# Altium PCB ver2.PcbDoc
Units mm, origin at the board's own origin, x right, y up, seen from the top; angles counter-clockwise.
Board outline 257.18 x 120.4 mm, 2 copper layers (Top Layer, Bottom Layer); 122 components, 93 nets, 415 pads, 0 vias.
Unrouted connection lines stored in the file: 14.
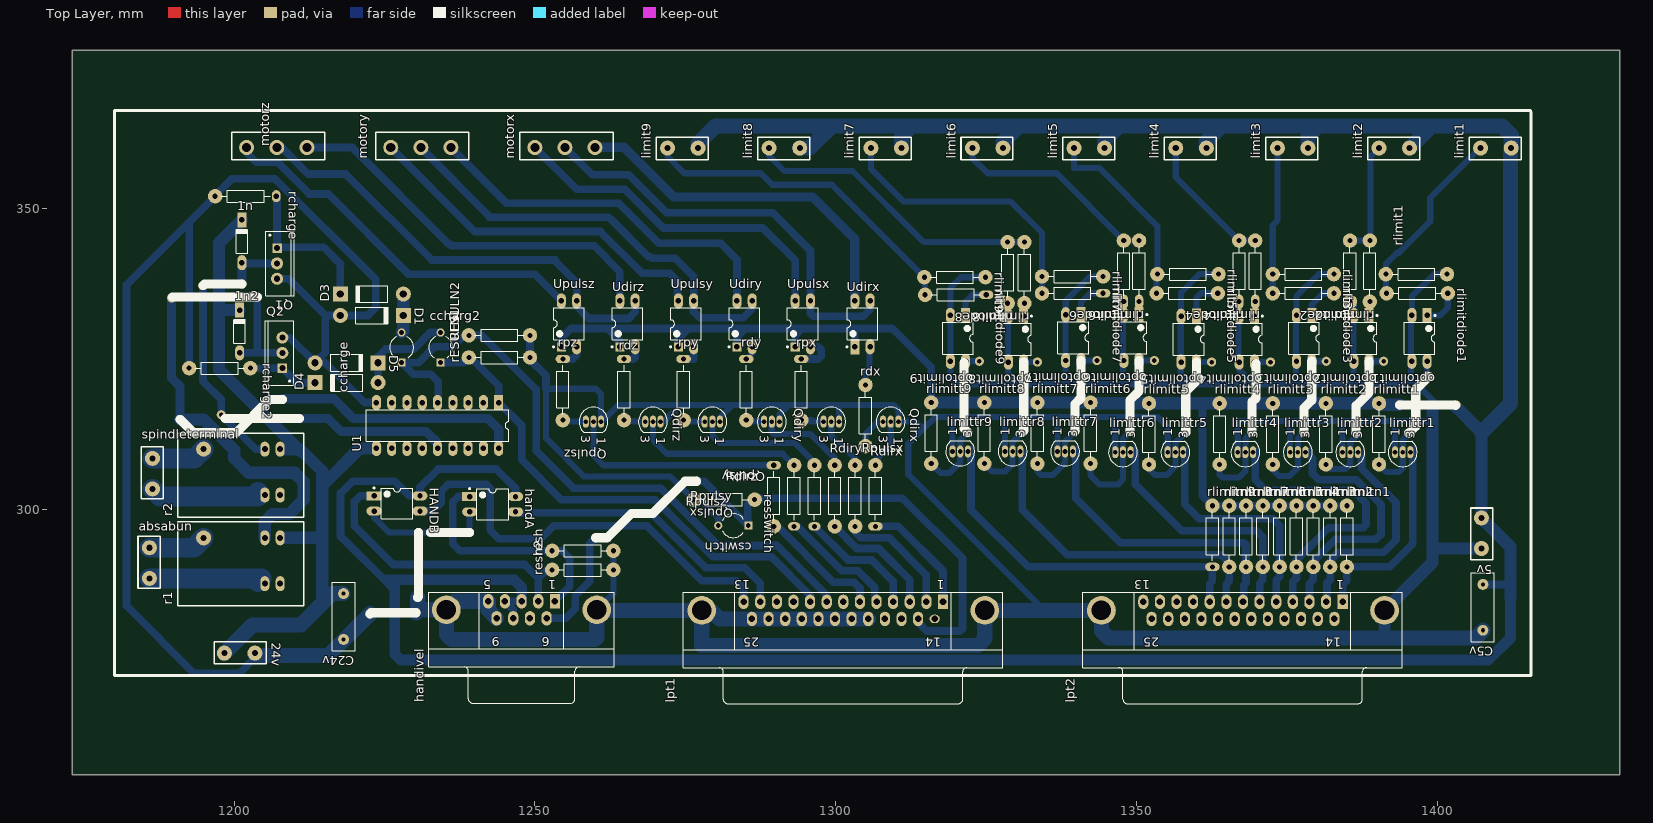
[diagram p0: Top Layer view]
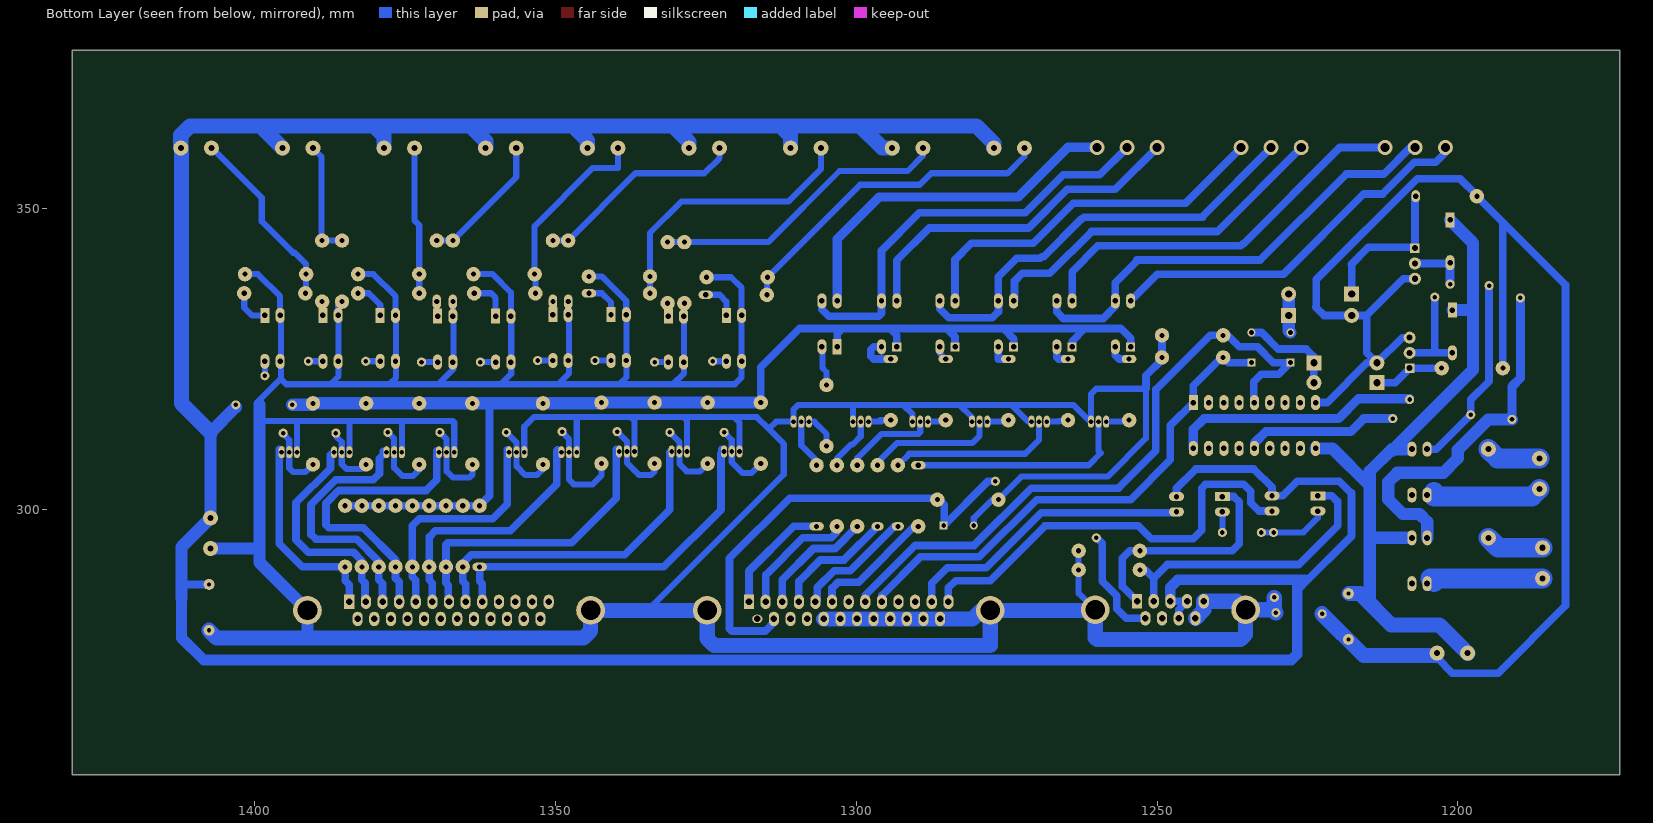
[diagram p1: Bottom Layer view, seen from below]

## Layer stack, top to bottom
Top Solder: solder mask 0.0102, Solder Resist, Dk 3.5
Top Layer: signal copper 0.0356
Dielectric 1: dielectric 0.32, FR-4, Dk 4.8
Bottom Layer: signal copper 0.0356
Bottom Solder: solder mask 0.0102, Solder Resist, Dk 3.5

## Board outline
1173.099,255.905 1430.274,255.905 1430.274,376.301 1173.099,376.301

## Design rules (kind name [scope] priority, off if disabled: settings)
Clearance [All] p1: gap=0.254
PolygonConnect [All] p1: connectstyle=Relief reliefconductorwidth=0.254 reliefentries=4 polygonreliefangle="90 Angle" airgapwidth=0.254
RoutingVias [All] p1: holewidth=0.711 width=1.27 viastyle="Through Hole" minholewidth=0.711 minwidth=1.27 maxholewidth=0.711 maxwidth=1.27
SolderMaskExpansion [All] p1: expansion=0.102
Width [All] p1: maxlimit=5.08 minlimit=0.254 preferedwidth=1.524
29 further rules are at their usual default settings.

## Components (designator, comment, footprint, x,y, rotation, side; value= is the part's Value field where it differs from the comment)
1n "Diode 1N914" DO-35 1201.293,344.551 r90 top
1n2 "Diode 1N914" DO-35 1200.912,329.565 r90 top
5v "termb2" PCBComponent_1#1 1407.287,298.577 r270 top
24v "termb2" PCBComponent_1#1 1198.372,276.098 r0 top
absabun "termb2" PCBComponent_1#1 1185.926,288.544 r90 top
C5v "Cap" RAD-0.3 1407.541,283.718 r270 top
C24v "Cap" RAD-0.3 1218.184,282.194 r270 top
ccharg2 "Cap2" CAPR5-4X5 1234.313,326.898 r90 top
ccharge "Cap2" CAPR5-4X5 1227.836,326.898 r90 top
cswitch "Cap2" CAPR5-4X5 1282.954,297.307 r180 top
D1 "Diode 1N4006" DO-41 1222.883,332.232 r0 top
D3 "Diode 1N4006" DO-41 1222.883,335.788 r180 top
D4 "Diode 1N4006" DO-41 1218.692,321.056 r180 top
D5 "Diode 1N4006" DO-41 1218.692,324.358 r0 top
handA "Optoisolator1" DIP-4#1 1242.949,300.863 r0 top
HANDB "Optoisolator1" DIP-4#1 1227.074,300.99 r0 top
handivel "D Connector 9" DSUB1.385-2H9 1247.775,273.812 r180 top
limit1 "termb2" PCBComponent_1#1 1412.24,360.045 r180 top
limit2 "termb2" PCBComponent_1#1 1395.349,360.045 r180 top
limit3 "termb2" PCBComponent_1#1 1378.458,360.045 r180 top
limit4 "termb2" PCBComponent_1#1 1361.567,360.045 r180 top
limit5 "termb2" PCBComponent_1#1 1344.676,360.045 r180 top
limit6 "termb2" PCBComponent_1#1 1327.785,360.045 r180 top
limit7 "termb2" PCBComponent_1#1 1310.894,360.045 r180 top
limit8 "termb2" PCBComponent_1#1 1294.003,360.045 r180 top
limit9 "termb2" PCBComponent_1#1 1277.112,360.045 r180 top
limittr1 "BC547" SOT54 1394.206,309.499 r90 top
limittr2 "BC547" SOT54 1385.491,309.499 r90 top
limittr3 "BC547" SOT54 1376.775,309.499 r90 top
limittr4 "BC547" SOT54 1368.06,309.499 r90 top
limittr5 "BC547" SOT54 1356.423,309.499 r90 top
limittr6 "BC547" SOT54 1347.708,309.499 r90 top
limittr7 "BC547" SOT54 1338.104,309.626 r90 top
limittr8 "BC547" SOT54 1329.388,309.626 r90 top
limittr9 "BC547" SOT54 1320.673,309.626 r90 top
lpt1 "D Connector 25" DSUB1.385-2H25A#1 1301.242,273.712 r180 top
lpt2 "D Connector 25" DSUB1.385-2H25A#2 1367.663,273.712 r180 top
motorx "terminal barg3" PCBComponent_1#2 1259.967,360.14 r180 top
motory "terminal barg3" PCBComponent_1#2 1236.027,360.14 r180 top
motorz "terminal barg3" PCBComponent_1#2 1212.088,360.14 r180 top
optolimit1 "Optoisolator1" DIP-4#1 1397,328.422 r270 top
optolimit2 "Optoisolator1" DIP-4#1 1387.348,328.422 r270 top
optolimit3 "Optoisolator1" DIP-4#1 1377.823,328.422 r270 top
optolimit4 "Optoisolator1" DIP-4#1 1368.298,328.295 r270 top
optolimit5 "Optoisolator1" DIP-4#1 1358.646,328.295 r270 top
optolimit6 "Optoisolator1" DIP-4#1 1349.121,328.549 r270 top
optolimit7 "Optoisolator1" DIP-4#1 1339.469,328.549 r270 top
optolimit8 "Optoisolator1" DIP-4#1 1329.944,328.295 r270 top
optolimit9 "Optoisolator1" DIP-4#1 1320.292,328.422 r270 top
Q1 "IRF530" TO-220AB 1207.135,340.868 r270 top
Q2 "IRF530" TO-220AB 1208.024,326.009 r90 top
Qdirx "BC547" SOT54 1309.116,314.579 r270 top
Qdiry "BC547" SOT54 1289.355,314.579 r270 top
Qdirz "BC547" SOT54 1269.594,314.579 r270 top
Qpulsx "BC547" SOT54 1299.235,314.579 r270 top
Qpulsy "BC547" SOT54 1279.474,314.579 r270 top
Qpulsz "BC547" SOT54 1259.713,314.579 r270 top
r1 "relay 24vdc" PCBComponent_1#3 1207.643,295.275 r180 top
r2 "relay 24vdc" PCBComponent_1#3 1207.643,310.007 r180 top
rcharge "Res2" AXIAL-0.4#1 1201.928,352.044 r0 top
rcharge2 "Res2" AXIAL-0.4#2 1197.61,323.469 r0 top
Rdirx "Res1" AXIAL-0.4#3 1306.576,302.26 r90 top
Rdiry "Res2" AXIAL-0.4#2 1299.82,302.26 r90 top
Rdirz "Res2" AXIAL-0.4#4 1293.063,302.26 r90 top
rdx "Res2" AXIAL-0.4#2 1304.925,315.595 r90 top
rdy "Res2" AXIAL-0.4#5 1285.113,319.913 r90 top
rdz "Res2" AXIAL-0.4#5 1264.793,319.913 r90 top
resh "Res2" AXIAL-0.4#2 1257.935,293.116 r180 top
resh2 "Res2" AXIAL-0.4#2 1257.935,289.941 r180 top
resswitch "Res2" AXIAL-0.4#2 1281.43,301.625 r0 top
rESULN1 "Res2" AXIAL-0.4#2 1244.092,325.247 r180 top
RESULN2 "Res2" AXIAL-0.4#2 1244.092,328.93 r180 top
rlimit1 "Res2" AXIAL-0.4#2 1396.492,339.09 r180 top
rlimit2 "Res2" AXIAL-0.4#2 1385.443,339.598 r270 top
rlimit3 "Res2" AXIAL-0.4#2 1377.696,339.09 r0 top
rlimit4 "Res2" AXIAL-0.4#6 1367.028,339.598 r270 top
rlimit5 "Res2" AXIAL-0.4#2 1358.519,339.09 r0 top
rlimit6 "Res2" AXIAL-0.4#6 1347.851,339.598 r270 top
rlimit7 "Res2" AXIAL-0.4#2 1339.342,338.709 r0 top
rlimit8 "Res2" AXIAL-0.4#2 1328.547,339.344 r270 top
rlimit9 "Res2" AXIAL-0.4#2 1319.784,338.582 r0 top
rlimitdiode1 "Res2" AXIAL-0.4#2 1396.619,335.915 r0 top
rlimitdiode2 "Res2" AXIAL-0.4#2 1388.745,339.598 r270 top
rlimitdiode3 "Res2" AXIAL-0.4#2 1377.696,335.915 r0 top
rlimitdiode4 "Res2" AXIAL-0.4#6 1369.695,339.598 r270 top
rlimitdiode5 "Res2" AXIAL-0.4#2 1358.392,335.915 r0 top
rlimitdiode6 "Res2" AXIAL-0.4#6 1350.391,339.598 r270 top
rlimitdiode7 "Res2" AXIAL-0.4#6 1339.342,335.915 r0 top
rlimitdiode8 "Res2" AXIAL-0.4#2 1331.341,339.344 r270 top
rlimitdiode9 "Res2" AXIAL-0.4#6 1319.911,335.661 r0 top
rlimitn1 "Res2" AXIAL-0.4#2 1384.935,295.529 r90 top
rlimitn2 "Res2" AXIAL-0.4#2 1382.141,295.529 r90 top
rlimitn3 "Res2" AXIAL-0.4#2 1379.347,295.529 r90 top
rlimitn4 "Res2" AXIAL-0.4#2 1376.553,295.529 r90 top
rlimitn5 "Res2" AXIAL-0.4#2 1373.759,295.529 r90 top
rlimitn6 "Res2" AXIAL-0.4#2 1370.965,295.529 r90 top
rlimitn7 "Res2" AXIAL-0.4#2 1368.171,295.529 r90 top
rlimitn8 "Res2" AXIAL-0.4#2 1365.377,295.529 r90 top
rlimitn9 "Res2" AXIAL-0.4#3 1362.583,295.529 r90 top
rlimitt1 "Res2" AXIAL-0.4#2 1390.269,312.547 r90 top
rlimitt2 "Res2" AXIAL-0.4#2 1381.442,312.547 r90 top
rlimitt3 "Res2" AXIAL-0.4#2 1372.616,312.547 r90 top
rlimitt4 "Res2" AXIAL-0.4#2 1363.789,312.547 r90 top
rlimitt5 "Res2" AXIAL-0.4#2 1352.042,312.547 r90 top
rlimitt6 "Res2" AXIAL-0.4#2 1342.326,312.674 r90 top
rlimitt7 "Res2" AXIAL-0.4#2 1333.5,312.674 r90 top
rlimitt8 "Res2" AXIAL-0.4#2 1324.673,312.674 r90 top
rlimitt9 "Res2" AXIAL-0.4#2 1315.847,312.674 r90 top
Rpulsx "Res2" AXIAL-0.4#2 1303.198,302.26 r90 top
Rpulsy "Res2" AXIAL-0.4#4 1296.441,302.26 r90 top
Rpulsz "Res2" AXIAL-0.4#5 1289.685,302.26 r90 top
rpx "Res2" AXIAL-0.4#5 1294.257,319.913 r90 top
rpy "Res2" AXIAL-0.4#5 1274.699,319.913 r90 top
rpz "Res2" AXIAL-0.4#5 1254.633,319.913 r90 top
spindleterminal "termb2" PCBComponent_1#1 1186.434,303.403 r90 top
U1 "ULN2803A" A18 1233.805,313.944 r180 top
Udirx "Optoisolator1" DIP-4#1 1304.417,330.835 r90 top
Udiry "Optoisolator1" DIP-4#2 1284.834,330.835 r90 top
Udirz "Optoisolator1" DIP-4#2 1265.377,330.835 r90 top
Upulsx "Optoisolator1" DIP-4#3 1294.511,330.835 r90 top
Upulsy "Optoisolator1" DIP-4#2 1275.105,330.835 r90 top
Upulsz "Optoisolator1" DIP-4#2 1255.649,330.835 r90 top

## Footprints (in the part's own frame and the unit in brackets; to place one, negate y for a bottom-side part, rotate by r counter-clockwise, add the part's x,y. Pads: shape width x height; smd on the part's side, far side on the other; paste and mask are expansions set on the pad)
A18 [mm] "DIP; 18 Leads; Row Spacing 7.62 mm; Pitch 2.54 mm"
  rect 1.5x2.5 hole 0.9: 1(-10.16,-3.81)
  oval 1.5x2.5 hole 0.9: 2(-7.62,-3.81) 3(-5.08,-3.81) 4(-2.54,-3.81) 5(0,-3.81) 6(2.54,-3.81) 7(5.08,-3.81) 8(7.62,-3.81) 9(10.16,-3.81) 10(10.16,3.81) 11(7.62,3.81) 12(5.08,3.81) 13(2.54,3.81) 14(0,3.81) 15(-2.54,3.81) 16(-5.08,3.81) 17(-7.62,3.81) 18(-10.16,3.81)
  silkscreen extent -11.85,-2.65 11.85,2.65
AXIAL-0.4#1 [mm] "Axial Device, Thru-Hole; 2 Leads; 0.4 in Pin Spacing"
  round 2.4 hole 0.85 unplated: 1(-5.08,0)
  oval 1.4x2 hole 0.85 unplated: 2(5.08,0)
  silkscreen extent -4.06,-1.02 4.06,1.02
AXIAL-0.4#2 [mm] "Axial Device, Thru-Hole; 2 Leads; 0.4 in Pin Spacing"
  round 2.4 hole 0.85 unplated: 1(-5.08,0) 2(5.08,0)
  silkscreen extent -4.06,-1.02 4.06,1.02
AXIAL-0.4#3 [mm] "Axial Device, Thru-Hole; 2 Leads; 0.4 in Pin Spacing"
  oval 1.4x2.4 hole 0.85 unplated: 1(-5.08,0)
  round 2.4 hole 0.85 unplated: 2(5.08,0)
  silkscreen extent -4.06,-1.02 4.06,1.02
AXIAL-0.4#4 [mm] "Axial Device, Thru-Hole; 2 Leads; 0.4 in Pin Spacing"
  oval 1.4x2 hole 0.85 unplated: 1(-5.08,0)
  round 2.4 hole 0.85 unplated: 2(5.08,0)
  silkscreen extent -4.06,-1.02 4.06,1.02
AXIAL-0.4#5 [mm] "Axial Device, Thru-Hole; 2 Leads; 0.4 in Pin Spacing"
  round 2.4 hole 0.85 unplated: 1(-5.08,0)
  oval 1.4x2.4 hole 0.85 unplated: 2(5.08,0)
  silkscreen extent -4.06,-1.02 4.06,1.02
AXIAL-0.4#6 [mm] "Axial Device, Thru-Hole; 2 Leads; 0.4 in Pin Spacing"
  round 2.4 hole 0.85 unplated: 1(-5.08,0)
  oval 2.4x1.4 hole 0.85 unplated: 2(5.08,0)
  silkscreen extent -4.06,-1.02 4.06,1.02
CAPR5-4X5 [mm] "Capacitor; 2 Leads"
  rect 1.35x1.35 hole 0.8: 1(-2.5,0)
  round 1.35 hole 0.8: 2(2.5,0)
  silkscreen extent -1.69,-2 1.82,2
DIP-4#1 [mm] "DIP; 4 Leads; Row Spacing 7.62 mm; Pitch 2.54 mm"
  rect 2.5x1.5 hole 0.9: 1(-3.81,1.27)
  oval 2.5x1.5 hole 0.9: 2(-3.81,-1.27) 3(3.81,-1.27) 4(3.81,1.27)
  silkscreen extent -3.93,-2.55 2.65,2.69, body extent -3.15,-2.5 3.15,2.5, height 5.6
DIP-4#2 [mm] "DIP; 4 Leads; Row Spacing 7.62 mm; Pitch 2.54 mm"
  rect 1.5x1.5 hole 0.9: 1(-3.81,1.27)
  oval 2.5x1.5 hole 0.9: 2(-3.81,-1.27) 3(3.81,-1.27) 4(3.81,1.27)
  silkscreen extent -3.93,-2.55 2.65,2.69, body extent -3.15,-2.5 3.15,2.5, height 5.6
DIP-4#3 [mm] "DIP; 4 Leads; Row Spacing 7.62 mm; Pitch 2.54 mm"
  rect 1.5x1.55 hole 0.9: 1(-3.81,1.27)
  oval 2.5x1.5 hole 0.9: 2(-3.81,-1.27) 3(3.81,-1.27) 4(3.81,1.27)
  silkscreen extent -3.93,-2.55 2.65,2.69, body extent -3.15,-2.5 3.15,2.5, height 5.6
DO-35 [mm] "Diode, Axial; Body 3.8 x 1.9 mm (LxDia. max), Lead Dia. 0.53 mm (max)"
  oval 2.5x1.5 hole 0.9: 1(-3.55,0)
  rect 2.5x1.5 hole 0.9: 2(3.55,0)
  silkscreen extent -1.95,-0.95 2.05,0.95
DO-41 [mm] "Diode, Axial; Body 5.2 x 2.7 mm (LxDia. max), Lead Dia. 0.86 mm (max)"
  round 2.5 hole 1.2: 1(-5.23,0)
  rect 2.5x2.5 hole 1.2: 2(5.23,0)
  silkscreen extent -2.65,-1.4 2.75,1.4
DSUB1.385-2H9 [mm] "Connector; D Subminiature; 9 Position; Right Angle; Pitch 1.385 mm"
  rect 1.69x2.4 hole 1.09: 1(-5.54,-10.92)
  oval 1.69x2.4 hole 1.09: 2(-2.77,-10.92) 3(0,-10.92) 4(2.77,-10.92) 5(5.54,-10.92) 6(-4.155,-8.08) 7(-1.385,-8.08) 8(1.385,-8.08) 9(4.155,-8.08)
  round 4.76 hole 3.26: 10(-12.495,-9.5) 11(12.495,-9.5)
  silkscreen extent -15.4,-12.4 15.4,6
DSUB1.385-2H25A#1 [mm] "Connector; D Subminiature; 25 Position; Right Angle; Pitch 1.385 mm"
  rect 1.69x2.4 hole 1.09: 1(-16.566,-10.92)
  oval 1.69x2.4 hole 1.09: 2(-13.805,-10.92) 3(-11.044,-10.92) 4(-8.283,-10.92) 5(-5.522,-10.92) 6(-2.761,-10.92) 7(0,-10.92) 8(2.761,-10.92) 9(5.522,-10.92) 10(8.283,-10.92) 11(11.044,-10.92) 12(13.805,-10.92) 13(16.566,-10.92) 15(-12.424,-8.08) 16(-9.663,-8.08) 17(-6.902,-8.08) 18(-4.141,-8.08) 19(-1.38,-8.08) 20(1.381,-8.08) 21(4.142,-8.08) 22(6.903,-8.08) 23(9.664,-8.08) 24(12.425,-8.08) 25(15.186,-8.08)
  oval 1.69x1.4 hole 1.09: 14(-15.185,-8.08)
  round 4.76 hole 3.26: 26(-23.526,-9.5) 27(23.526,-9.5)
  silkscreen extent -26.5,-12.5 26.6,6
DSUB1.385-2H25A#2 [mm] "Connector; D Subminiature; 25 Position; Right Angle; Pitch 1.385 mm"
  rect 1.69x2.4 hole 1.09: 1(-16.566,-10.92)
  oval 1.69x2.4 hole 1.09: 2(-13.805,-10.92) 3(-11.044,-10.92) 4(-8.283,-10.92) 5(-5.522,-10.92) 6(-2.761,-10.92) 7(0,-10.92) 8(2.761,-10.92) 9(5.522,-10.92) 10(8.283,-10.92) 11(11.044,-10.92) 12(13.805,-10.92) 13(16.566,-10.92) 14(-15.185,-8.08) 15(-12.424,-8.08) 16(-9.663,-8.08) 17(-6.902,-8.08) 18(-4.141,-8.08) 19(-1.38,-8.08) 20(1.381,-8.08) 21(4.142,-8.08) 22(6.903,-8.08) 23(9.664,-8.08) 24(12.425,-8.08) 25(15.186,-8.08)
  round 4.76 hole 3.26: 26(-23.526,-9.5) 27(23.526,-9.5)
  silkscreen extent -26.5,-12.5 26.6,6
PCBComponent_1#1 [mm]
  round 2.5 hole 1: 1(0,0) 2(5.08,0)
  silkscreen extent -1.65,-1.78 6.98,1.91
PCBComponent_1#2 [mm]
  round 2.5 hole 1.5: 0(0,0) 1(5,0) 2(10,0)
  silkscreen extent -3,-2.5 12.5,2
PCBComponent_1#3 [mm]
  oval 1.5x2.5 hole 1: 1(0,7.62) 2(2.54,7.62) 11(2.54,0) 12(0,0)
  round 2.5 hole 1: 7(12.7,0)
  silkscreen extent -3.94,-2.67 17.02,11.3
RAD-0.3 [mm] "Radial Cap, Thru-Hole; 2 Leads; 0.3 in Pin Spacing"
  round 1.8 hole 0.7: 1(-3.81,0) 2(3.81,0)
  silkscreen extent -5.71,-1.91 5.71,1.91
SOT54 [mm] "TO, Flat Index; 3 In-Line, Axial Leads; Body Dia. 4.6mm; Leads 0.48 x 0.45 mm (max)"
  oval 2x1 hole 0.8: 1(0,1.27) 2(0,0) 3(0,-1.27)
  silkscreen extent -2.4,-2.4 1.8,2.4
TO-220AB [mm] "TO, Thru-Hole, Vertical, Heatsink Mounted; 3 In-Line Leads; Pitch 2.54 mm"
  rect 1.6x1.6 hole 1: 1(-2.54,0)
  round 2 hole 1: 2(0,0) 3(2.54,0)
  silkscreen extent -5.35,-1.85 5.35,2.85, body extent -5.4,-1.9 5.4,2.9, height 19.3

## Part data
1n 1n2: "High Conductance Fast Diode"
C5v C24v ccharg2 ccharge cswitch: "Capacitor"
D1 D3 D4 D5: "1 Amp General Purpose Rectifier"
handA HANDB optolimit1 optolimit2 optolimit3 optolimit4 optolimit5 optolimit6 optolimit7 optolimit8 optolimit9 Udirx Udiry Udirz Upulsx Upulsy Upulsz: "4-Pin Phototransistor Optocoupler"
handivel: "Receptacle Assembly, 9 Position, Right Angle"
limittr1 limittr2 limittr3 limittr4 limittr5 limittr6 limittr7 limittr8 limittr9 Qdirx Qdiry Qdirz Qpulsx Qpulsy Qpulsz: "NPN General-purpose Transistor"
lpt1 lpt2: "Receptacle Assembly, 25 Position, Right Angle"
Q1 Q2: "HEXFET N-Channel Power MOSFET"
rcharge rcharge2 Rdiry Rdirz rdx rdy rdz resh resh2 resswitch rESULN1 RESULN2 rlimit1 rlimit2 rlimit3 rlimit4 rlimit5 rlimit6 rlimit7 rlimit8 rlimit9 rlimitdiode1 rlimitdiode2 rlimitdiode3 rlimitdiode4 rlimitdiode5 rlimitdiode6 rlimitdiode7 rlimitdiode8 rlimitdiode9 rlimitn1 rlimitn2 rlimitn3 rlimitn4 rlimitn5 rlimitn6 rlimitn7 rlimitn8 rlimitn9 rlimitt1 rlimitt2 rlimitt3 rlimitt4 rlimitt5 rlimitt6 rlimitt7 rlimitt8 rlimitt9 Rpulsx Rpulsy Rpulsz rpx rpy rpz: "Resistor"
Rdirx: library part Res2, "Resistor"
U1: "High-Voltage, High-Current Darlington Array"

## Free pads (board coordinates)
  round 1.524 hole 0.762: 0(1197.864,315.722) 0(1391.031,324.612) 0(1395.222,312.674) 0(1398.27,322.199) 1(1191.006,314.96) 1(1381.506,324.612) 1(1386.459,312.674) 2(1210.818,315.087) 2(1372.235,324.485) 2(1377.823,312.801) 3(1194.816,337.185) 3(1201.293,337.439) 3(1362.456,324.485) 3(1369.187,312.801) 4(1203.833,335.28) 4(1358.138,312.801) 5(1208.024,318.262) 5(1348.867,312.928) 6(1352.931,324.739) 7(1189.609,335.153) 7(1343.406,324.739) 8(1339.723,312.928) 9(1222.565,282.638) 9(1330.96,312.801) 10(1230.249,282.829) 10(1321.943,312.801) 11(1323.848,324.612) 12(1230.63,296.164) 12(1333.5,324.485) 13(1230.503,285.369) 13(1393.698,317.373) 14(1403.096,317.373) 15(1260.094,295.275) 16(1276.858,304.673) 17(1239.139,296.164) 18(1232.662,296.164)

## Nets (pads, with @x,y where several pads share a name; then routed paths per layer and width w, separated by ;. In a path a pad name is that pad's centre, name@x,y a point inside that pad or via, vN(x,y) a via of type N, cw(c..) or ccw(c..) an arc to the next point about the centre after c; other vN are vias at no path point)
A: handA.1 handivel.1 resh.2 | length 38.7
  Bottom Layer w1.27: handA.1 1237.234,302.133 1236.345,301.244 1236.345,294.259 1237.488,293.116 resh.2 1254.506,293.116 1255.776,291.846 1255.776,287.193 handivel.1
ABSABUN: ccharg2.1 lpt1.9 rESULN1.2 U1.1 | length 84.2
  Bottom Layer w1.27: ccharg2.1 1238.163,324.398 rESULN1.2 1239.266,325.247 1243.965,320.548 U1.1 1247.775,313.944 1247.775,308.229 1254.379,301.625 1270,301.625 1279.525,292.1 1289.304,292.1 1295.72,285.684 lpt1.9
ABSABUNCNT: pad.1@1191.006,314.96 pad.7@1189.609,335.153 r1.11 | length 60.1
  Bottom Layer w1.524: pad.7@1189.609,335.153 1189.609,321.818 1191.006,320.421 pad.1@1191.006,314.96
  Bottom Layer w2.032: pad.1@1191.006,314.96 1194.943,314.96 1200.023,309.88 1200.023,308.483 1202.436,306.07 1210.056,306.07 1211.58,304.546 1211.58,301.625 1209.167,299.212 1206.373,299.212 1205.103,297.942 r1.11
ABSABUNCNT1: 1n2.1 pad.4@1203.833,335.28 Q2.2 | length 16.5
  Bottom Layer w1.27: 1n2.1 1200.918,326.009 1203.833,326.009 ; pad.4@1203.833,335.28 1203.833,326.009 ; Q2.2 1203.833,326.009
  Bottom Layer w1.524: 1n2.1 1n2.1@1201.045,326.015
ABSABUNCNT2: pad.5@1208.024,318.262 U1.18 | length 41.2
  Bottom Layer w1.524: pad.5@1208.024,318.389 1216.533,318.389 1219.835,315.087 1242.187,315.087 1243.965,313.309 U1.18
ABSABUNTERM1: absabun.1 r1.2 | length 19.6
  Bottom Layer w3.302: absabun.1 1204.595,288.544 1203.96,287.909
ABSABUNTERM2: absabun.2 r1.7 | length 9.7
  Bottom Layer w3.302: absabun.2 1193.292,293.624 r1.7
AHAND: handA.3 lpt1.12 | length 48.9
  Bottom Layer w1.27: handA.3@1246.505,299.466 1269.238,299.466 1278.382,290.322 1284.859,290.322 1287.437,287.744 lpt1.12
B: HANDB.1 handivel.2 resh2.2 | length 48.5
  Bottom Layer w1.27: 1219.962,301.371 1219.962,297.307 1226.439,290.83 1248.283,290.83 1250.545,288.568 1250.545,288.52 ; 1220.089,301.371 1220.978,302.26 HANDB.1 ; handivel.2 1250.545,288.52 ; resh2.2 1251.966,289.941 1250.545,288.52
BHAND: HANDB.3 lpt1.13 | length 72.1
  Bottom Layer w1.27: HANDB.3 1233.043,299.72 1234.44,301.117 1234.44,303.022 1235.583,304.165 1241.933,304.165 1242.568,303.53 1242.568,296.545 1243.965,295.148 1250.95,295.148 1253.109,297.307 1268.603,297.307 1277.747,288.163 1283.462,288.163 1284.676,286.949 lpt1.13
DIRX: lpt1.1 Rdirx.1 | length 19.4
  Bottom Layer w1.27: Rdirx.1 1310.386,297.18 1317.808,289.758 lpt1.1
DIRXDRIVE: motorx.0 Udirx.4 | length 59.8
  Bottom Layer w1.524: motorx.0 1259.999,360.172 1264.793,360.172 1273.048,351.917 1296.162,351.917 1303.147,344.932 Udirx.4
DIRY: lpt1.3 Rdiry.1 | length 19.8
  Bottom Layer w1.27: Rdiry.1 1303.503,293.497 1307.084,293.497 1312.286,288.295 lpt1.3
DIRZ: lpt1.5 Rdirz.1 | length 20.1
  Bottom Layer w1.27: Rdirz.1 1293.622,297.18 1300.988,289.814 1303.655,289.814 1306.449,287.02 1306.449,284.947 lpt1.5
DRIYDRIVE: motory.0 Udiry.4 | length 62.1
  Bottom Layer w1.27: motory.0 1245.267,350.901 1263.904,350.901 1270.559,344.246 1280.846,344.246 1283.564,341.528 Udiry.4
DRIZDRIVE: motorz.0 Udirz.4 | length 65.4
  Bottom Layer w1.27: motorz.0 1219.613,360.14 1235.583,344.17 1235.71,344.17 1236.066,343.814 1259.815,343.814 1264.107,339.522 Udirz.4
GND: 5v.2 24v.2 C5v.2 C24v.2 cswitch.2 D1.1 D5.1 handA.2 HANDB.2 handivel.5 handivel.9 handivel.10 handivel.11 limittr1.1 limittr2.1 limittr3.1 limittr4.1 limittr5.1 limittr6.1 limittr7.1 limittr8.1 limittr9.1 lpt1.18 lpt1.19 lpt1.20 lpt1.21 lpt1.22 lpt1.23 lpt1.24 lpt1.25 lpt1.26 lpt1.27 lpt2.26 lpt2.27 optolimit1.2 optolimit1.3 optolimit2.2 optolimit2.3 optolimit3.2 optolimit3.3 optolimit4.2 optolimit4.3 optolimit5.2 optolimit5.3 optolimit6.2 optolimit6.3 optolimit7.2 optolimit7.3 optolimit8.2 optolimit8.3 optolimit9.2 optolimit9.3 pad.9@1222.565,282.638 pad.10@1230.249,282.829 pad.12@1230.63,296.164 pad.13@1230.503,285.369 pad.17 pad.18 Q1.3 Q2.3 Qdirx.1 Qdiry.1 Qdirz.1 Qpulsx.1 Qpulsy.1 Qpulsz.1 rcharge2.1 rcharge.1 resh2.1 resh.1 resswitch.1 rESULN1.1 RESULN2.1 rlimit1.1 rlimit2.2 rlimit3.2 rlimit4.2 rlimit5.2 rlimit6.2 rlimit7.2 rlimit8.2 rlimit9.2 U1.9 | length 1115.7
  Bottom Layer w1.016: HANDB.2 1223.264,298.577 1225.677,296.164 pad.18 ; pad.17 handA.2 ; handivel.10 1263.015,286.057 resh2.1 resh.1 ; Qdirz.1 1271.397,314.579 1274.191,317.373 ; cswitch.2 1280.454,298.537 1277.366,301.625 resswitch.1 1272.54,305.435 1258.189,305.435 1251.839,311.785 1251.839,320.04 1260.094,320.04 1260.983,319.151 Qpulsz.1 1261.11,314.579 1263.904,317.373 1274.191,317.373 ; Qpulsy.1 1280.744,315.29 1282.827,317.373 ; Qdiry.1 1290.625,315.773 1292.225,317.373 ; Qpulsx.1 1300.505,316.967 ; limittr9.1 1319.403,314.452 1320.292,315.341 ; rlimit9.2 1320.8,338.582 1319.022,336.804 optolimit9.2 optolimit9.3 1319.022,321.945 1320.165,320.802 1330.452,320.802 ; limittr8.1 1328.118,314.785 1328.674,315.341 ; rlimit8.2 1328.547,332.232 optolimit8.2@1328.595,332.184 ; optolimit8.2 optolimit8.2@1328.595,332.184 ; 1334.641,283.212 1312.037,305.816 1312.037,310.896 1314.514,313.373 ; limittr7.1 1336.834,314.738 1337.437,315.341 ; optolimit7.2@1338.167,332.232 1338.167,321.977 1339.342,320.802 ; optolimit7.2 1338.199,334.645 1342.263,338.709 rlimit7.2 ; limittr6.1 1346.438,315.087 ; optolimit6.2@1347.74,332.232 1347.74,322.564 1349.502,320.802 ; optolimit6.2 rlimit6.2 ; limittr5.1 1355.153,313.753 1353.566,315.341 1337.437,315.341 ; optolimit5.2@1357.312,332.232 1357.312,322.517 1359.027,320.802 ; optolimit5.2 1357.376,336.042 1360.424,339.09 rlimit5.2 ; limittr4.1 1366.79,314.468 1367.028,314.706 1398.397,314.706 ; optolimit4.2@1366.885,332.232 1366.885,323.358 1369.441,320.802 ; optolimit4.2 rlimit4.2 ; limittr3.1 1375.505,314.325 ; optolimit3.2@1376.458,332.232 1376.458,321.913 1377.569,320.802 ; optolimit3.2 1376.553,335.407 1380.236,339.09 rlimit3.2 ; limittr2.1 1384.221,314.452 ; rlimit2.2 1386.078,333.883 optolimit2.2 ; optolimit2.2@1386.03,332.232 1386.03,322.12 1387.348,320.802 ; limittr1.1 1392.936,314.706 ; optolimit1.2@1395.603,332.232 1395.603,321.691 ; optolimit1.2 1395.73,335.407 1399.413,339.09 rlimit1.1 ; 1399.667,310.642 1399.667,317.627 1395.603,321.691 ; 1274.191,317.373 1282.827,317.373 ; 1282.827,317.373 1292.225,317.373 ; 1292.225,317.373 1309.624,317.373 1310.386,316.611 Qdirx.1 1313.307,314.579 1314.514,313.373 ; 1314.514,313.373 1316.482,315.341 1320.292,315.341 ; 1320.292,315.341 1328.674,315.341 ; optolimit8.2@1328.595,332.184 1328.595,322.659 1330.452,320.802 ; 1328.674,315.341 1337.437,315.341 ; 1330.452,320.802 1339.342,320.802 ; 1339.342,320.802 1387.348,320.802 ; 1387.348,320.802 1394.714,320.802 1395.603,321.691
  Bottom Layer w1.27: rcharge2.1 1192.53,347.726 ; 24v.2 1203.452,275.336 1200.912,272.796 1193.292,272.796 1182.116,283.972 1182.116,337.312 1192.53,347.726 ; Q1.3 1209.04,338.328 1215.136,332.232 ; Q2.3 1209.271,328.549 D5.1 ; U1.9 1221.74,317.754 1215.136,324.358 D5.1 ; RESULN2.1 1249.172,324.866 1251.839,322.199 1251.839,320.04 ; 1192.53,347.726 rcharge.1 1196.848,352.171 1199.642,354.965 1206.754,354.965 1223.518,338.201 1223.518,333.756 1223.645,333.629 1222.248,332.232 D1.1 1215.136,332.232 ; D5.1 1215.136,326.032 1215.136,332.232
  Bottom Layer w2.032: 1390.904,278.638 1391.189,278.923 lpt2.26 1399.159,291.182 1399.159,317.373 ; 1399.794,293.497 5v.2
  Bottom Layer w2.54: 24v.2@1203.579,275.717 1215.644,275.717 pad.9@1222.565,282.638 ; pad.10@1230.249,282.829 pad.10@1230.503,283.083 ; pad.13@1230.503,285.369 pad.10@1230.503,283.083 ; handivel.9 1242.235,283.277 handivel.5 1236.7,284.732 handivel.11 ; lpt1.18 lpt1.19 lpt1.20 lpt1.21 lpt1.22 lpt1.23 lpt1.24 lpt1.25 1280.689,281.792 1279.269,283.212 lpt1.27 ; C5v.2 1406.271,278.638 1390.904,278.638 1345.311,278.638 1344.137,279.812 lpt2.27 lpt1.26 1324.768,278.542 1323.594,277.368 1277.716,277.368 lpt1.27 ; pad.10@1230.503,283.083 1230.732,283.312 handivel.11 ; handivel.11 1235.28,279.224 1236.12,278.384 1259.967,278.384 1260.27,278.687 handivel.10 1260.37,283.212 lpt1.27
GNDX: motorx.1 Udirx.3 Upulsx.3 | length 70.3
  Bottom Layer w1.27: motorx.1 1259.507,355.6 1265.555,355.6 1271.88,349.275 1289.533,349.275 1295.781,343.027 Upulsx.3 1295.781,332.613 1296.289,332.105 1304.544,332.105 1305.687,333.248 Udirx.3
GNDY: motory.1 Udiry.3 Upulsy.3 | length 72.1
  Bottom Layer w1.27: motory.1 1242.426,348.742 ; 1242.426,348.539 1262.202,348.539 1262.507,348.234 1262.634,348.234 1268.857,342.011 1269.111,342.011 1269.39,341.732 1273.327,341.732 1276.375,338.684 Upulsy.3 1276.35,334.62 1276.35,332.867 1277.366,331.851 1284.605,331.851 1286.104,333.35 Udiry.3
GNDZ: motorz.1 Udirz.3 Upulsz.3 | length 75.8
  Bottom Layer w1.27: motorz.1 1207.929,360.14 1212.342,355.727 1218.565,355.727 1232.84,341.452 1253.363,341.452 ; 1253.363,341.249 1256.919,337.693 1256.919,333.756 1258.951,331.724 1265.555,331.724 1266.647,332.816 Udirz.3
LIMIT1: limit1.2 rlimit1.2 rlimitdiode1.1 | length 30.9
  Bottom Layer w1.016: rlimitdiode1.1 1391.412,336.042 rlimit1.2 1391.412,340.741 1393.317,342.646 1393.571,342.646 1398.778,347.853 1398.778,351.79 1407.033,360.045 limit1.2
LIMIT2: limit2.2 rlimit2.1 rlimitdiode2.1 | length 19.3
  Bottom Layer w1.016: rlimit2.1 rlimitdiode2.1 1388.872,344.805 1388.872,358.648 limit2.2
LIMIT3: limit3.2 rlimit3.1 rlimitdiode3.1 | length 24.4
  Bottom Layer w1.016: rlimitdiode3.1 rlimit3.1 1372.616,347.218 1373.378,347.98 1373.378,351.282 limit3.2
LIMIT4: limit4.2 rlimit4.1 rlimitdiode4.1 | length 22.4
  Bottom Layer w1.016: limit4.2 1356.487,355.219 rlimit4.1 rlimitdiode4.1
LIMIT5: limit5.2 rlimit5.1 rlimitdiode5.1 | length 32.4
  Bottom Layer w1.016: limit5.2 1339.596,356.743 1343.787,356.743 1353.439,347.091 rlimit5.1 1353.312,338.963 rlimitdiode5.1
LIMIT6: limit6.2 rlimit6.1 rlimitdiode6.1 | length 35
  Bottom Layer w1.016: limit6.2 1322.705,358.394 1325.245,355.854 1336.675,355.854 rlimit6.1 rlimitdiode6.1
LIMIT7: limit7.2 rlimit7.1 rlimitdiode7.1 | length 46.3
  Bottom Layer w1.016: limit7.2 1305.814,356.616 1311.275,351.155 1329.055,351.155 1334.262,345.948 rlimit7.1 rlimitdiode7.1
LIMIT8: limit8.2 rlimit8.1 rlimitdiode8.1 | length 49.6
  Bottom Layer w1.016: limit8.2 1288.923,358.775 1291.463,356.235 1302.766,356.235 1314.577,344.424 rlimit8.1 rlimitdiode8.1
LIMIT9: limit9.2 rlimit9.1 rlimitdiode9.1 | length 55.4
  Bottom Layer w1.016: limit9.2 1272.032,358.648 1274.826,355.854 1287.526,355.854 1289.431,353.949 1299.337,353.949 rlimit9.1 1314.831,338.455 rlimitdiode9.1
LIMITN1: limittr1.3 lpt2.1 rlimitn1.1 | length 34.4
  Bottom Layer w1.27: lpt2.1 1384.229,287.457 1384.935,288.163 rlimitn1.1 1392.047,290.449 1395.857,294.259 limittr1.3@1395.857,310.007
LIMITN2: limittr2.3 lpt2.2 rlimitn2.1 | length 36.4
  Bottom Layer w1.27: lpt2.2 1381.633,284.797 1381.633,287.782 1382.141,288.29 rlimitn2.1 1382.141,291.465 1383.538,292.862 1391.031,292.862 1393.1,294.931 1393.1,301.08 1387.348,306.832 1387.348,309.031 limittr2.3@1387.05,309.328
LIMITN3: limittr3.3 lpt2.3 rlimitn3.1 | length 42.5
  Bottom Layer w1.27: 1378.585,309.626 1378.585,309.078 1379.22,308.443 1379.22,305.943 1380.236,304.927 1386.459,304.927 1390.605,300.781 1390.605,295.783 ; lpt2.3 1378.707,287.65 1379.347,288.29 rlimitn3.1 1379.347,291.338 1383.03,295.021 1389.761,295.021 1390.523,295.783
LIMITN4: limittr4.3 lpt2.4 rlimitn4.1 | length 49.6
  Bottom Layer w1.27: limittr4.3@1369.695,309.753 1369.695,304.927 1371.473,303.149 1385.951,303.149 1388.11,300.99 1388.11,297.434 1387.602,296.926 1381.887,296.926 1376.553,291.592 rlimitn4.1 1376.553,288.544 1375.946,287.937 lpt2.4
LIMITN5: limittr5.3 lpt2.5 rlimitn5.1 | length 39.2
  Bottom Layer w1.27: limittr5.3@1358.011,309.88 1358.011,300.863 1360.424,298.45 1360.805,298.45 1372.616,298.45 1373.759,297.307 rlimitn5.1 1373.759,288.798 1373.185,288.224 lpt2.5
LIMITN6: limittr6.3 lpt2.6 rlimitn6.1 | length 41.6
  Bottom Layer w1.27: 1349.629,309.88 1349.756,309.753 1349.756,304.165 1357.461,296.46 1369.949,296.46 ; 1369.949,296.418 1370.965,295.402 rlimitn6.1 1370.965,288.29 1370.424,287.749 lpt2.6
LIMITN7: limittr7.3 lpt2.7 rlimitn7.1 | length 49.3
  Bottom Layer w1.27: limittr7.3@1339.85,310.007 1339.85,309.269 1339.85,301.879 1347.258,294.471 1367.832,294.471 1368.171,294.132 rlimitn7.1 1368.171,287.782 1367.79,287.401 lpt2.7@1367.79,284.632
LIMITN8: limittr8.3 lpt2.8 rlimitn8.1 | length 54.2
  Bottom Layer w1.27: limittr8.3@1330.96,309.443 1330.96,299.974 1338.453,292.481 1363.98,292.481 1365.377,291.084 rlimitn8.1 1365.377,288.036 1364.902,287.561 lpt2.8
LIMITN9: limittr9.3 lpt2.9 rlimitn9.1 | length 60.2
  Bottom Layer w1.27: limittr9.3@1322.324,310.007 1322.324,309.364 1322.451,309.237 1322.451,299.974 1331.976,290.449 rlimitn9.1 1362.583,288.097 1362.141,287.655 lpt2.9
LIMITTC1: limittr1.2 optolimit1.4 pad.0@1395.222,312.674 pad.0@1398.27,322.199 rlimitt1.1 | length 13.4
  Bottom Layer w1.016: rlimitt1.1 1391.539,306.197 1393.571,306.197 1394.206,306.832 limittr1.2 1394.206,311.531 1395.222,312.547 pad.0@1395.222,312.674 ; pad.0@1398.27,322.199 optolimit1.4
LIMITTC2: limittr2.2 optolimit2.4 pad.0@1391.031,324.612 pad.1@1386.459,312.674 rlimitt2.1 | length 12.7
  Bottom Layer w1.016: rlimitt2.1 1382.205,306.705 1384.681,306.705 1385.491,307.515 limittr2.2 1385.491,311.198 1386.459,312.166 pad.1@1386.459,312.674 ; optolimit2.4 pad.0@1391.031,324.612
LIMITTC3: limittr3.2 optolimit3.4 pad.1@1381.506,324.612 pad.2@1377.823,312.801 rlimitt3.1 | length 14.8
  Bottom Layer w1.016: rlimitt3.1 1372.616,306.578 1373.632,305.562 1375.41,305.562 1376.775,306.927 limittr3.2 1376.775,311.753 pad.2@1377.823,312.801 ; optolimit3.4 pad.1@1381.506,324.612
LIMITTC4: limittr4.2 optolimit4.4 pad.2@1372.235,324.485 pad.3@1369.187,312.801 rlimitt4.1 | length 16.2
  Bottom Layer w1.016: rlimitt4.1 1363.789,305.752 1364.234,305.308 1367.028,305.308 1368.06,306.34 limittr4.2 1368.06,311.674 pad.3@1369.187,312.801 ; optolimit4.4 pad.2@1372.235,324.485
LIMITTC5: limittr5.2 optolimit5.4 pad.3@1362.456,324.485 pad.4@1358.138,312.801 rlimitt5.1 | length 15.1
  Bottom Layer w1.016: rlimitt5.1 1352.042,306.705 1353.058,305.689 1354.963,305.689 1356.423,307.149 limittr5.2 1356.423,311.087 pad.4@1358.138,312.801 ; optolimit5.4 pad.3@1362.456,324.485
LIMITTC6: limittr6.2 optolimit6.4 pad.5@1348.867,312.928 pad.6 rlimitt6.1 | length 19.3
  Bottom Layer w1.016: rlimitt6.1 1342.326,305.625 1343.787,304.165 1346.93,304.165 1347.708,304.943 limittr6.2 1347.708,311.642 1348.867,312.801 pad.5@1348.867,312.928 ; optolimit6.4 pad.6
LIMITTC7: limittr7.2 optolimit7.4 pad.7@1343.406,324.739 pad.8 rlimitt7.1 | length 15.5
  Bottom Layer w1.016: rlimitt7.1 1333.5,306.324 1334.135,305.689 1336.04,305.689 1338.104,307.753 limittr7.2 1338.104,311.309 pad.8 ; optolimit7.4 pad.7@1343.406,324.739
LIMITTC8: limittr8.2 optolimit8.4 pad.9@1330.96,312.801 pad.12@1333.5,324.485 rlimitt8.1 | length 13.9
  Bottom Layer w1.016: rlimitt8.1 1325.943,306.324 1328.166,306.324 1329.388,307.546 limittr8.2 1329.388,311.229 pad.9@1330.96,312.801 ; optolimit8.4 pad.12@1333.5,324.485
LIMITTC9: limittr9.2 optolimit9.4 pad.10@1321.943,312.801 pad.11 rlimitt9.1 | length 14
  Bottom Layer w1.016: rlimitt9.1 1317.371,306.07 1318.895,306.07 1320.673,307.848 limittr9.2 1320.673,311.531 pad.10@1321.943,312.801 ; optolimit9.4 pad.11
Netccharg2_2: ccharg2.2 D4.1 D5.2 | length 16.4
  Bottom Layer w1.27: D4.1 D5.2 1223.922,325.397 1225.169,326.644 1229.868,326.644 1232.622,329.398 ccharg2.2
Netccharge_2: ccharge.2 D1.2 D3.1 | length 6.5
  Bottom Layer w2.032: ccharge.2 1228.113,329.675 D1.2 D3.1
NetD3_2: D3.2 Q1.1 rcharge.2 | length 25.3
  Bottom Layer w1.27: rcharge.2 1207.135,351.917 Q1.1@1207.135,343.535 ; Q1.1 Q1.1@1207.135,343.535 ; D3.2 1217.653,340.718 1217.676,340.741 1214.882,343.535 Q1.1@1207.135,343.535
NetD4_2: D4.2 Q2.1 rcharge2.2 | length 11.8
  Bottom Layer w1.27: rcharge2.2 Q2.1 1210.437,321.056 D4.2
Netoptolimit1_1: optolimit1.1 rlimitdiode1.2 | length 6.4
  Bottom Layer w1.016: optolimit1.1 1400.429,332.232 1401.699,333.502 rlimitdiode1.2
Netoptolimit2_1: optolimit2.1 rlimitdiode2.2 | length 2.3
  Bottom Layer w1.016: optolimit2.1 1388.618,334.391 rlimitdiode2.2
Netoptolimit3_1: optolimit3.1 rlimitdiode3.2 | length 6.3
  Bottom Layer w1.016: optolimit3.1 1379.093,334.01 1380.998,335.915 rlimitdiode3.2
Netoptolimit4_1: optolimit4.1 rlimitdiode4.2 | length 2.5
  Bottom Layer w1.016: optolimit4.1 1369.695,332.232 rlimitdiode4.2
Netoptolimit5_1: optolimit5.1 rlimitdiode5.2 | length 6.9
  Bottom Layer w1.016: optolimit5.1 1359.916,335.153 1360.678,335.915 rlimitdiode5.2
Netoptolimit6_1: optolimit6.1 rlimitdiode6.2 | length 2.2
  Bottom Layer w1.016: optolimit6.1 rlimitdiode6.2
Netoptolimit7_1: optolimit7.1 rlimitdiode7.2 | length 6.3
  Bottom Layer w1.016: optolimit7.1 1340.739,334.391 1342.263,335.915 rlimitdiode7.2
Netoptolimit8_1: optolimit8.1 rlimitdiode8.2 | length 2.2
  Bottom Layer w1.016: optolimit8.1 1331.341,332.232 rlimitdiode8.2
Netoptolimit9_1: optolimit9.1 rlimitdiode9.2 | length 6.2
  Bottom Layer w1.016: optolimit9.1 1321.562,334.518 1322.705,335.661 rlimitdiode9.2
NetQdirx_2: Qdirx.2 Rdirx.2 | length 8.3
  Bottom Layer w1.016: Rdirx.2 1306.576,308.102 1309.116,310.642 Qdirx.2
NetQdirx_3: Qdirx.3 rdx.1 | length 5.8
  Bottom Layer w1.016: rdx.1 1304.925,312.547 1306.957,314.579 Qdirx.3
NetQdiry_2: Qdiry.2 Rdiry.2 | length 15.2
  Bottom Layer w1.016: Qdiry.2 1289.355,312.852 1289.66,312.547 1295.781,312.547 1299.82,308.508 Rdiry.2
NetQdiry_3: Qdiry.3 rdy.1 | length 3.2
  Bottom Layer w1.016: rdy.1 1285.113,314.579 Qdiry.3
NetQdirz_2: Qdirz.2 Rdirz.2 | length 28.3
  Bottom Layer w1.016: Qdirz.2 1269.594,311.556 1271.905,309.245 1291.209,309.245 1291.209,309.194 Rdirz.2
NetQdirz_3: Qdirz.3 rdz.1 | length 3.6
  Bottom Layer w1.016: rdz.1@1265.047,314.706 1266.444,314.706 1266.317,314.579 Qdirz.3
NetQpulsx_2: Qpulsx.2 Rpulsx.2 | length 9
  Bottom Layer w1.016: Qpulsx.2 1299.235,312.141 1300.607,310.769 1300.861,310.769 1303.198,308.432 Rpulsx.2
NetQpulsx_3: Qpulsx.3 rpx.1 | length 4.3
  Bottom Layer w1.016: rpx.1 1296.035,314.833 1295.781,314.579 Qpulsx.3
NetQpulsy_2: Qpulsy.2 Rpulsy.2 | length 21.6
  Bottom Layer w1.016: Qpulsy.2 1279.474,312.217 1280.668,311.023 1293.241,311.023 1296.441,307.823 Rpulsy.2
NetQpulsy_3: Qpulsy.3 rpy.1 | length 3.5
  Bottom Layer w1.016: rpy.1@1274.699,314.579 Qpulsy.3
NetQpulsz_2: Qpulsz.2 Rpulsz.2 | length 36.6
  Bottom Layer w1.016: Qpulsz.2 1259.713,309.753 1259.332,309.372 1261.364,307.34 Rpulsz.2
NetQpulsz_3: Qpulsz.3 rpz.1 | length 4.7
  Bottom Layer w1.016: rpz.1 1254.379,314.579 1256.411,314.579 ; 1256.157,314.579 Qpulsz.3
OPTODIRX: rdx.2 Udirx.2 | length 6.6
  Bottom Layer w1.016: rdx.2 1304.925,322.834 1305.56,323.469 Udirx.2@1305.56,327.025
OPTODY: rdy.2 Udiry.2 | length 2.4
  Bottom Layer w1.016: rdy.2 1286.104,325.984 Udiry.2
OPTODZ: rdz.2 Udirz.2 | length 3.7
  Bottom Layer w1.27: rdz.2 1266.317,324.993 1266.647,325.323 Udirz.2
OPTOPY: rpy.2 Upulsy.2 | length 3.7
  Bottom Layer w1.27: rpy.2 1276.375,324.993 Upulsy.2
OPTOPZ: rpz.2 Upulsz.2 | length 3.9
  Bottom Layer w1.27: rpz.2 1256.284,324.993 1256.919,325.628 Upulsz.2
OPTPX: rpx.2 Upulsx.2 | length 6.5
  Bottom Layer w1.27: rpx.2 1297.051,324.993 1297.559,325.501 1297.559,326.517 1297.051,327.025 Upulsx.2
PULSX: lpt1.2 Rpulsx.1 | length 20.2
  Bottom Layer w1.27: Rpulsx.1 1303.198,296.24 1304.163,295.275 1308.862,295.275 1315.047,289.09 lpt1.2
"PULSX DRIVE": motorx.2 Upulsx.4 | length 57.8
  Bottom Layer w1.27: motorx.2 1256.92,353.187 1264.92,353.187 1271.346,346.761 1287.856,346.761 1293.241,341.376 Upulsx.4
PULSY: lpt1.4 Rpulsy.1 | length 20.3
  Bottom Layer w1.27: Rpulsy.1 1302.029,291.592 1305.941,291.592 1309.525,288.008 lpt1.4
PULSYDRIVE: motory.2 Upulsy.4 | length 60.2
  Bottom Layer w1.27: motory.2 1239.991,346.177 1260.881,346.177 1267.841,339.217 1272.413,339.217 1273.683,337.947 1273.683,334.797 Upulsy.4
PULSZ: lpt1.6 Rpulsz.1 | length 20.9
  Bottom Layer w1.27: Rpulsz.1 1290.32,297.18 1299.591,287.909 1303.02,287.909 1304.003,286.926 lpt1.6
PULSZDRIVE: motorz.2 Upulsz.4 | length 63.4
  Bottom Layer w1.27: motorz.2 1202.088,359.25 1203.662,357.676 1207.218,357.676 1212.469,352.425 1215.644,352.425 1228.979,339.09 1249.934,339.09 Upulsz.4
SPINDLE: ccharge.1 lpt1.8 RESULN2.2 U1.5 | length 108.4
  Bottom Layer w1.27: U1.5 1233.932,317.881 1233.932,321.183 1232.662,322.453 1229.781,322.453 ccharge.1 1230.67,324.398 1233.297,327.025 1236.345,327.025 1238.25,328.93 RESULN2.2 1241.171,328.93 1250.188,319.913 1250.188,309.753 1256.411,303.53 1270.889,303.53 1280.414,294.005 1290.193,294.005 1298.481,285.717 lpt1.8
"SPINDLE TRM1": r2.2 spindleterminal.1 | length 18.8
  Bottom Layer w3.302: spindleterminal.1 1187.704,302.133 1203.96,302.133 1203.96,302.895
"SPINDLE TRM2": r2.7 spindleterminal.2 | length 9.1
  Bottom Layer w3.302: spindleterminal.2 1193.419,308.483 r2.7
SPINDLECNT: pad.0@1197.864,315.722 pad.3@1194.816,337.185 r2.11 | length 32.3
  Bottom Layer w1.27: pad.3@1194.816,337.185 1194.816,321.31 1197.864,318.262 1197.864,315.722 1203.579,310.007 r2.11
SPINDLECNT1: 1n.1 pad.3@1201.293,337.439 Q1.2 | length 9.5
  Bottom Layer w1.27: 1n.1 1201.426,340.868 Q1.2
  Bottom Layer w1.524: pad.3@1201.293,337.439 1n.1
SPINDLECNT2: pad.2@1210.818,315.087 U1.14 | length 25.6
  Bottom Layer w1.524: pad.2@1210.818,315.087 1215.644,315.087 1217.803,312.928 1231.9,312.928 1233.805,311.023 U1.14
SWITCH: cswitch.1 handivel.6 lpt1.15 pad.15 pad.16 resswitch.2 | length 93.7
  Bottom Layer w1.27: handivel.6 1255.093,281.892 1256.665,283.464 1256.665,285.623 1259.078,288.036 1259.078,294.386 pad.15@1259.84,295.148 ; pad.16@1277.112,304.673 1278.088,304.673 cswitch.1 ; cswitch.1@1285.367,297.561 1285.367,300.736 1286.51,301.879 1311.021,301.879 1321.054,291.846 1321.054,280.162 1320.673,279.781 1315.085,279.781 1313.666,281.2 lpt1.15
VCC5V: 5v.1 C5v.1 handA.4 HANDB.4 handivel.3 handivel.4 handivel.8 limit1.1 limit2.1 limit3.1 limit4.1 limit5.1 limit6.1 limit7.1 limit8.1 limit9.1 pad.13@1393.698,317.373 pad.14 rlimitn1.2 rlimitn2.2 rlimitn3.2 rlimitn4.2 rlimitn5.2 rlimitn6.2 rlimitn7.2 rlimitn8.2 rlimitn9.2 rlimitt1.2 rlimitt2.2 rlimitt3.2 rlimitt4.2 rlimitt5.2 rlimitt6.2 rlimitt7.2 rlimitt8.2 rlimitt9.2 Udirx.1 Udiry.1 Udirz.1 Upulsx.1 Upulsy.1 Upulsz.1 | length 765.8
  Bottom Layer w1.27: 1217.676,302.768 1217.676,295.529 1225.931,287.274 1226.947,287.274 1226.693,287.02 ; 1217.803,302.768 1219.708,304.673 1226.693,304.673 1229.106,302.26 HANDB.4 1230.884,303.657 1233.932,306.705 1243.584,306.705 1246.759,303.53 handA.4 ; handivel.8 1246.39,283.347 handivel.4 handivel.3 ; Upulsz.1 1254.379,328.422 1256.03,330.073 1261.999,330.073 ; Udirz.1 1264.107,327.965 1261.999,330.073 ; Upulsy.1 1273.835,328.32 1275.588,330.073 ; Udiry.1 1283.564,328.651 1284.986,330.073 ; Upulsx.1 1293.241,328.93 1294.384,330.073 ; Udirx.1 1303.147,329.184 1302.258,330.073 ; rlimitt9.2 1315.847,323.596 1309.37,330.073 1302.258,330.073 ; rlimitt6.2 rlimitt6.2@1342.453,317.627 ; 1360.805,317.627 1360.932,317.5 1360.932,302.26 rlimitn9.2 rlimitn8.2 rlimitn7.2 rlimitn6.2 rlimitn5.2 rlimitn4.2 rlimitn3.2 rlimitn2.2 rlimitn1.2 ; C5v.1 1411.859,287.528 1412.113,287.274 ; 1261.999,330.073 1275.588,330.073 ; 1275.588,330.073 1284.986,330.073 ; 1284.986,330.073 1294.384,330.073 ; 1294.384,330.073 1302.258,330.073
  Bottom Layer w1.778: 1225.423,288.29 1246.505,288.29 1247.775,287.02 handivel.3 ; 1226.693,287.02 1226.693,275.971 1227.709,274.955 1408.43,274.955 1412.113,278.638 1412.113,285.115
  Bottom Layer w2.032: rlimitt9.2 rlimitt8.2 rlimitt7.2 rlimitt6.2 ; rlimitt6.2@1342.453,317.627 rlimitt5.2 1360.805,317.627 rlimitt4.2 rlimitt3.2 rlimitt2.2 rlimitt1.2 1390.269,317.373 pad.13@1393.698,317.373 ; pad.14@1403.096,316.992 1407.287,312.801 5v.1 1412.113,293.751 1412.113,287.274 1412.113,285.115
  Bottom Layer w2.54: limit9.1 1277.112,360.807 1280.033,363.728 1299.337,363.728 ; limit8.1 1295.654,360.045 1299.337,363.728 ; limit7.1 1310.894,362.077 1312.545,363.728 ; limit6.1 1327.785,361.061 1330.452,363.728 ; limit5.1 1344.676,361.315 1347.089,363.728 ; limit4.1 1361.567,361.188 1364.107,363.728 ; limit3.1 1378.458,362.077 1380.109,363.728 ; limit2.1 1399.032,363.728 ; 1407.287,312.801 1412.113,317.627 limit1.1@1412.113,360.172 ; limit1.1 1412.24,362.204 1410.716,363.728 1399.032,363.728 ; 1299.337,363.728 1312.545,363.728 ; 1312.545,363.728 1330.452,363.728 ; 1330.452,363.728 1347.089,363.728 ; 1347.089,363.728 1364.107,363.728 ; 1364.107,363.728 1380.109,363.728 ; 1380.109,363.728 1399.032,363.728
VCC24V: 1n2.2 1n.2 24v.1 C24v.1 r1.12 r2.12 U1.10 | length 120.1
  Bottom Layer w2.032: 1n2.2 1197.604,333.115 1197.483,332.994 ; 1n.2 1197.483,344.291 1197.483,332.994 ; r1.12@1208.024,295.275 1214.501,295.275 1214.628,295.402 ; r2.12@1208.024,310.007 1210.945,310.007 1214.628,306.324 1214.628,303.911 ; 1210.945,309.753 1197.483,323.215 1197.483,332.994 ; 1214.628,285.369 1214.628,295.402 ; U1.10 1220.851,310.134 1214.628,303.911 ; 1214.628,295.402 1214.628,303.911
  Bottom Layer w2.54: 24v.1 1203.071,280.797 1211.072,280.797 1216.279,286.004 C24v.1@1218.057,286.004
pads on no net: handivel.7 lpt1.7 lpt1.10 lpt1.11 lpt1.14 lpt1.16 lpt1.17 lpt2.10 lpt2.11 lpt2.12 lpt2.13 lpt2.14 lpt2.15 lpt2.16 lpt2.17 lpt2.18 lpt2.19 lpt2.20 lpt2.21 lpt2.22 lpt2.23 lpt2.24 lpt2.25 r1.1 r2.1 U1.2 U1.3 U1.4 U1.6 U1.7 U1.8 U1.11 U1.12 U1.13 U1.15 U1.16 U1.17

## Silkscreen, mask and mechanical layers (free items; w line width, h text height)
Top Overlay:
  lines w0.508: 1415.415,366.268 1180.084,366.268 1180.084,272.415 1415.542,272.415 1415.542,366.014
  lines w1.524: 1189.736,335.28 1203.833,335.28 ; 1191.006,314.96 1193.165,312.801 1200.404,312.801 1205.865,318.262 1208.024,318.262 ; 1194.816,337.185 1195.07,337.439 1201.293,337.439 ; 1198.499,315.087 1210.818,315.087 ; 1222.565,282.638 1222.756,282.829 1230.249,282.829 ; 1230.503,285.369 1230.63,285.496 1230.63,296.164 ; 1232.662,296.164 1239.139,296.164 ; 1260.094,295.275 1261.999,295.275 1266.063,299.339 1269.619,299.339 1274.953,304.673 1276.858,304.673 ; 1321.308,324.358 1321.308,313.436 1321.943,312.801 ; 1330.96,312.801 1331.214,313.055 1331.214,324.485 ; 1339.723,313.055 1339.723,317.5 1340.739,318.516 1340.739,324.739 ; 1348.867,312.928 1348.867,318.135 1350.391,319.659 1350.391,324.739 ; 1358.138,312.801 1358.138,319.532 1359.916,321.31 1359.916,324.485 ; 1369.187,312.801 1369.187,317.881 1369.822,318.516 1369.822,324.231 ; 1377.823,312.801 1377.823,316.865 1379.093,318.135 1379.093,324.612 ; 1386.459,312.674 1386.459,317.246 1388.618,319.405 1388.618,324.612 ; 1393.698,317.373 1393.952,317.373 1402.842,317.373 1402.969,317.246 ; 1395.222,312.674 1396.365,313.817 1396.365,319.913 1398.524,322.072

## Text inside footprints (layer, text, board x,y; h text height)
handivel: Top Overlay "6" at 1252.43,278.787 h1.5 r180; Top Overlay "9" at 1244.12,278.787 h1.5 r180; Top Overlay "5" at 1242.735,288.187 h1.5 r180; Top Overlay "1" at 1253.565,288.187 h1.5 r180
limittr1: Top Overlay "1" at 1393.686,312.115 h1.5 r90; Top Overlay "3" at 1396.226,311.774 h1.5 r90
limittr2: Top Overlay "1" at 1384.971,312.115 h1.5 r90; Top Overlay "3" at 1387.511,311.774 h1.5 r90
limittr3: Top Overlay "1" at 1376.255,312.115 h1.5 r90; Top Overlay "3" at 1378.795,311.774 h1.5 r90
limittr4: Top Overlay "1" at 1367.54,312.115 h1.5 r90; Top Overlay "3" at 1370.08,311.774 h1.5 r90
limittr5: Top Overlay "1" at 1355.904,312.115 h1.5 r90; Top Overlay "3" at 1358.444,311.774 h1.5 r90
limittr6: Top Overlay "1" at 1347.188,312.115 h1.5 r90; Top Overlay "3" at 1349.728,311.774 h1.5 r90
limittr7: Top Overlay "1" at 1337.584,312.242 h1.5 r90; Top Overlay "3" at 1340.124,311.901 h1.5 r90
limittr8: Top Overlay "1" at 1328.868,312.242 h1.5 r90; Top Overlay "3" at 1331.408,311.901 h1.5 r90
limittr9: Top Overlay "1" at 1320.153,312.242 h1.5 r90; Top Overlay "3" at 1322.693,311.901 h1.5 r90
lpt1: Top Overlay "1" at 1318.058,288.187 h1.5 r180; Top Overlay "13" at 1285.801,288.187 h1.5 r180; Top Overlay "14" at 1317.552,278.687 h1.5 r180; Top Overlay "25" at 1287.306,278.687 h1.5 r180
lpt2: Top Overlay "1" at 1384.479,288.187 h1.5 r180; Top Overlay "13" at 1352.222,288.187 h1.5 r180; Top Overlay "14" at 1383.973,278.687 h1.5 r180; Top Overlay "25" at 1353.727,278.687 h1.5 r180
Qdirx: Top Overlay "1" at 1309.636,311.963 h1.5 r270; Top Overlay "3" at 1307.096,312.304 h1.5 r270
Qdiry: Top Overlay "1" at 1289.875,311.963 h1.5 r270; Top Overlay "3" at 1287.335,312.304 h1.5 r270
Qdirz: Top Overlay "1" at 1270.114,311.963 h1.5 r270; Top Overlay "3" at 1267.574,312.304 h1.5 r270
Qpulsx: Top Overlay "1" at 1299.755,311.963 h1.5 r270; Top Overlay "3" at 1297.215,312.304 h1.5 r270
Qpulsy: Top Overlay "1" at 1279.994,311.963 h1.5 r270; Top Overlay "3" at 1277.454,312.304 h1.5 r270
Qpulsz: Top Overlay "1" at 1260.233,311.963 h1.5 r270; Top Overlay "3" at 1257.693,312.304 h1.5 r270